# EAGLE board led_breakout_panel (EAGLE 6.5.0)
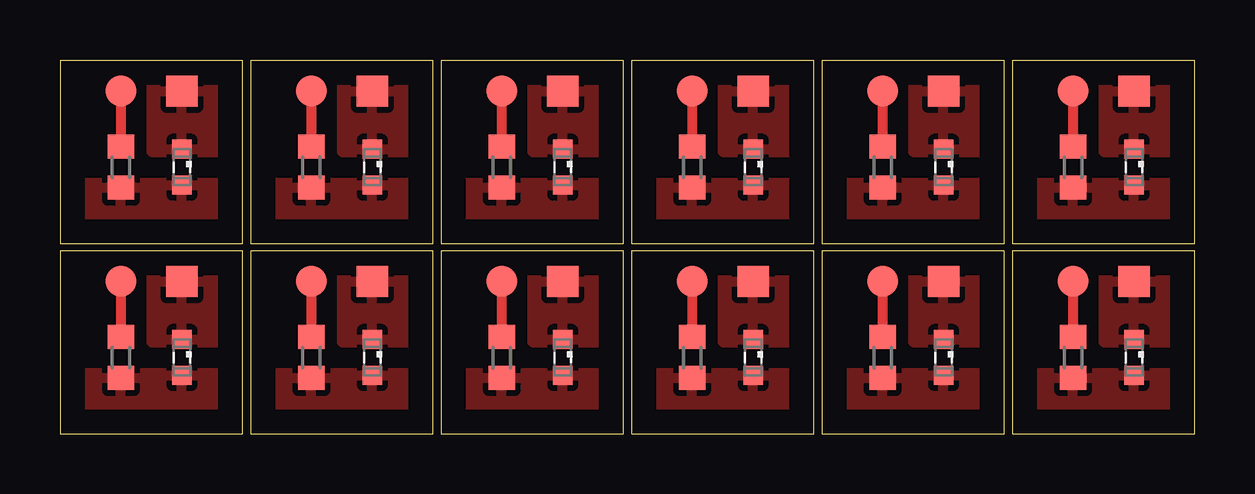
[diagram p0: board, top side]

Size 47.31 x 15.56 mm. Coordinates in mm from the lower left corner, seen from the top.
Outline: 0,0 7.62,0 7.62,7.62 0,7.62 0,0
Outline: 0,7.94 7.62,7.94 7.62,15.56 0,15.56 0,7.94
Outline: 7.94,0 15.56,0 15.56,7.62 7.94,7.62 7.94,0
Outline: 7.94,7.94 15.56,7.94 15.56,15.56 7.94,15.56 7.94,7.94
Outline: 15.88,0 23.5,0 23.5,7.62 15.88,7.62 15.88,0
Outline: 15.88,7.94 23.5,7.94 23.5,15.56 15.88,15.56 15.88,7.94
Outline: 23.81,0 31.43,0 31.43,7.62 23.81,7.62 23.81,0
Outline: 23.81,7.94 31.43,7.94 31.43,15.56 23.81,15.56 23.81,7.94
Outline: 31.75,0 39.37,0 39.37,7.62 31.75,7.62 31.75,0
Outline: 31.75,7.94 39.37,7.94 39.37,15.56 31.75,15.56 31.75,7.94
Outline: 39.69,0 47.31,0 47.31,7.62 39.69,7.62 39.69,0
Outline: 39.69,7.94 47.31,7.94 47.31,15.56 39.69,15.56 39.69,7.94
Copper layers (1*16): Top 0.035mm / dielectric 1.5mm / Bottom 0.035mm
Design rules "default": minimum track width 10mil, minimum drill 24mil, track to track 8mil, track to pad 8mil, pad to pad 8mil, via to via 8mil, smd to smd 8mil, copper to edge 40mil, drill to drill 8mil, minimum pad ring 10mil, minimum via ring 8mil, stop-mask expansion 4mil, vias tented up to drill 0mil, thermal gap 10mil

## Footprints (pad centres in the part's own frame; a part is rotated, then mirrored left to right if it is on the bottom)
TP13R = smd 1.3 x 1.3: TP 0,0
TP13SQ = smd 1.3 x 1.3: TP 0,0
SML0603 = smd 0.8 x 0.8: A 0.75,0; C -0.75,0
R0603 = smd 1 x 1.1: 1 -0.85,0; 2 0.85,0

## Placement (x,y rotation side)
5V  TPTP13R  [TP13R]  2.54,6.35 0 top
5V1  TPTP13R  [TP13R]  2.54,14.29 0 top
5V2  TPTP13R  [TP13R]  10.48,6.35 0 top
5V3  TPTP13R  [TP13R]  10.48,14.29 0 top
5V4  TPTP13R  [TP13R]  18.41,6.35 0 top
5V5  TPTP13R  [TP13R]  18.41,14.29 0 top
5V6  TPTP13R  [TP13R]  26.35,6.35 0 top
5V7  TPTP13R  [TP13R]  26.35,14.29 0 top
5V8  TPTP13R  [TP13R]  34.29,6.35 0 top
5V9  TPTP13R  [TP13R]  34.29,14.29 0 top
5V10  TPTP13R  [TP13R]  42.23,6.35 0 top
5V11  TPTP13R  [TP13R]  42.23,14.29 0 top
GND  TPTP13SQ  [TP13SQ]  5.08,6.35 0 top
GND1  TPTP13SQ  [TP13SQ]  5.08,14.29 0 top
GND2  TPTP13SQ  [TP13SQ]  13.02,6.35 0 top
GND3  TPTP13SQ  [TP13SQ]  13.02,14.29 0 top
GND4  TPTP13SQ  [TP13SQ]  20.95,6.35 0 top
GND5  TPTP13SQ  [TP13SQ]  20.95,14.29 0 top
GND6  TPTP13SQ  [TP13SQ]  28.89,6.35 0 top
GND7  TPTP13SQ  [TP13SQ]  28.89,14.29 0 top
GND8  TPTP13SQ  [TP13SQ]  36.83,6.35 0 top
GND9  TPTP13SQ  [TP13SQ]  36.83,14.29 0 top
GND10  TPTP13SQ  [TP13SQ]  44.77,6.35 0 top
GND11  TPTP13SQ  [TP13SQ]  44.77,14.29 0 top
LED1  [SML0603]  5.08,3.17 270 top
LED2  [SML0603]  5.08,11.11 270 top
LED3  [SML0603]  13.02,3.17 270 top
LED4  [SML0603]  13.02,11.11 270 top
LED5  [SML0603]  20.95,3.17 270 top
LED6  [SML0603]  20.95,11.11 270 top
LED7  [SML0603]  28.89,3.17 270 top
LED8  [SML0603]  28.89,11.11 270 top
LED9  [SML0603]  36.83,3.17 270 top
LED10  [SML0603]  36.83,11.11 270 top
LED11  [SML0603]  44.77,3.17 270 top
LED12  [SML0603]  44.77,11.11 270 top
R1  220  [R0603]  2.54,3.17 270 top
R2  220  [R0603]  2.54,11.11 270 top
R3  220  [R0603]  10.48,3.17 270 top
R4  220  [R0603]  10.48,11.11 270 top
R5  220  [R0603]  18.41,3.17 270 top
R6  220  [R0603]  18.41,11.11 270 top
R7  220  [R0603]  26.35,3.17 270 top
R8  220  [R0603]  26.35,11.11 270 top
R9  220  [R0603]  34.29,3.17 270 top
R10  220  [R0603]  34.29,11.11 270 top
R11  220  [R0603]  42.23,3.17 270 top
R12  220  [R0603]  42.23,11.11 270 top

## Library data of the parts
5V 5V1-5V11 GND GND1-GND11 = testpad
LED1-LED12 = led
R1-R12 = rcl

## Nets
5V: 5V.TP R1.1
5V1: 5V1.TP R2.1
5V2: 5V2.TP R3.1
5V3: 5V3.TP R4.1
5V4: 5V4.TP R5.1
5V5: 5V5.TP R6.1
5V6: 5V6.TP R7.1
5V7: 5V7.TP R8.1
5V8: 5V8.TP R9.1
5V9: 5V9.TP R10.1
5V10: 5V10.TP R11.1
5V11: 5V11.TP R12.1
GND: GND.TP LED1.C
GND1: GND1.TP LED2.C
GND2: GND2.TP LED3.C
GND3: GND3.TP LED4.C
GND4: GND4.TP LED5.C
GND5: GND5.TP LED6.C
GND6: GND6.TP LED7.C
GND7: GND7.TP LED8.C
GND8: GND8.TP LED9.C
GND9: GND9.TP LED10.C
GND10: GND10.TP LED11.C
GND11: GND11.TP LED12.C
LEDSUPPLY: LED1.A R1.2
LEDSUPPLY1: LED2.A R2.2
LEDSUPPLY2: LED3.A R3.2
LEDSUPPLY3: LED4.A R4.2
LEDSUPPLY4: LED5.A R5.2
LEDSUPPLY5: LED6.A R6.2
LEDSUPPLY6: LED7.A R7.2
LEDSUPPLY7: LED8.A R8.2
LEDSUPPLY8: LED9.A R9.2
LEDSUPPLY9: LED10.A R10.2
LEDSUPPLY10: LED11.A R11.2
LEDSUPPLY11: LED12.A R12.2

## Tracks (layer width: path | path; a pad name or v marks a point on that pad's centre or on a via)
5V
  Top 0.406: 5V.TP R1.1
5V1
  Top 0.406: 5V1.TP R2.1
5V2
  Top 0.406: 5V2.TP R3.1
5V3
  Top 0.406: 5V3.TP R4.1
5V4
  Top 0.406: 5V4.TP R5.1
5V5
  Top 0.406: 5V5.TP R6.1
5V6
  Top 0.406: 5V6.TP R7.1
5V7
  Top 0.406: 5V7.TP R8.1
5V8
  Top 0.406: 5V8.TP R9.1
5V9
  Top 0.406: 5V9.TP R10.1
5V10
  Top 0.406: 5V10.TP R11.1
5V11
  Top 0.406: 5V11.TP R12.1
GND
  pour Top (isolate 0.406): 3.81,3.81 7.62,3.81 7.62,7.62 3.81,7.62
GND1
  pour Top (isolate 0.406): 3.81,11.75 7.62,11.75 7.62,15.56 3.81,15.56
GND2
  pour Top (isolate 0.406): 11.75,3.81 15.56,3.81 15.56,7.62 11.75,7.62
GND3
  pour Top (isolate 0.406): 11.75,11.75 15.56,11.75 15.56,15.56 11.75,15.56
GND4
  pour Top (isolate 0.406): 19.68,3.81 23.5,3.81 23.5,7.62 19.68,7.62
GND5
  pour Top (isolate 0.406): 19.68,11.75 23.5,11.75 23.5,15.56 19.68,15.56
GND6
  pour Top (isolate 0.406): 27.62,3.81 31.43,3.81 31.43,7.62 27.62,7.62
GND7
  pour Top (isolate 0.406): 27.62,11.75 31.43,11.75 31.43,15.56 27.62,15.56
GND8
  pour Top (isolate 0.406): 35.56,3.81 39.37,3.81 39.37,7.62 35.56,7.62
GND9
  pour Top (isolate 0.406): 35.56,11.75 39.37,11.75 39.37,15.56 35.56,15.56
GND10
  pour Top (isolate 0.406): 43.5,3.81 47.31,3.81 47.31,7.62 43.5,7.62
GND11
  pour Top (isolate 0.406): 43.5,11.75 47.31,11.75 47.31,15.56 43.5,15.56
LEDSUPPLY
  pour Top (isolate 0.406): 0,2.54 7.62,2.54 7.62,0.64 0,0.64
LEDSUPPLY1
  pour Top (isolate 0.406): 0,10.48 7.62,10.48 7.62,8.57 0,8.57
LEDSUPPLY2
  pour Top (isolate 0.406): 7.94,2.54 15.56,2.54 15.56,0.64 7.94,0.64
LEDSUPPLY3
  pour Top (isolate 0.406): 7.94,10.48 15.56,10.48 15.56,8.57 7.94,8.57
LEDSUPPLY4
  pour Top (isolate 0.406): 15.88,2.54 23.5,2.54 23.5,0.64 15.88,0.64
LEDSUPPLY5
  pour Top (isolate 0.406): 15.88,10.48 23.5,10.48 23.5,8.57 15.88,8.57
LEDSUPPLY6
  pour Top (isolate 0.406): 23.81,2.54 31.43,2.54 31.43,0.64 23.81,0.64
LEDSUPPLY7
  pour Top (isolate 0.406): 23.81,10.48 31.43,10.48 31.43,8.57 23.81,8.57
LEDSUPPLY8
  pour Top (isolate 0.406): 31.75,2.54 39.37,2.54 39.37,0.64 31.75,0.64
LEDSUPPLY9
  pour Top (isolate 0.406): 31.75,10.48 39.37,10.48 39.37,8.57 31.75,8.57
LEDSUPPLY10
  pour Top (isolate 0.406): 39.69,2.54 47.31,2.54 47.31,0.64 39.69,0.64
LEDSUPPLY11
  pour Top (isolate 0.406): 39.69,10.48 47.31,10.48 47.31,8.57 39.69,8.57